# EAGLE board simple-spectro-pro (EAGLE 8.3.0)
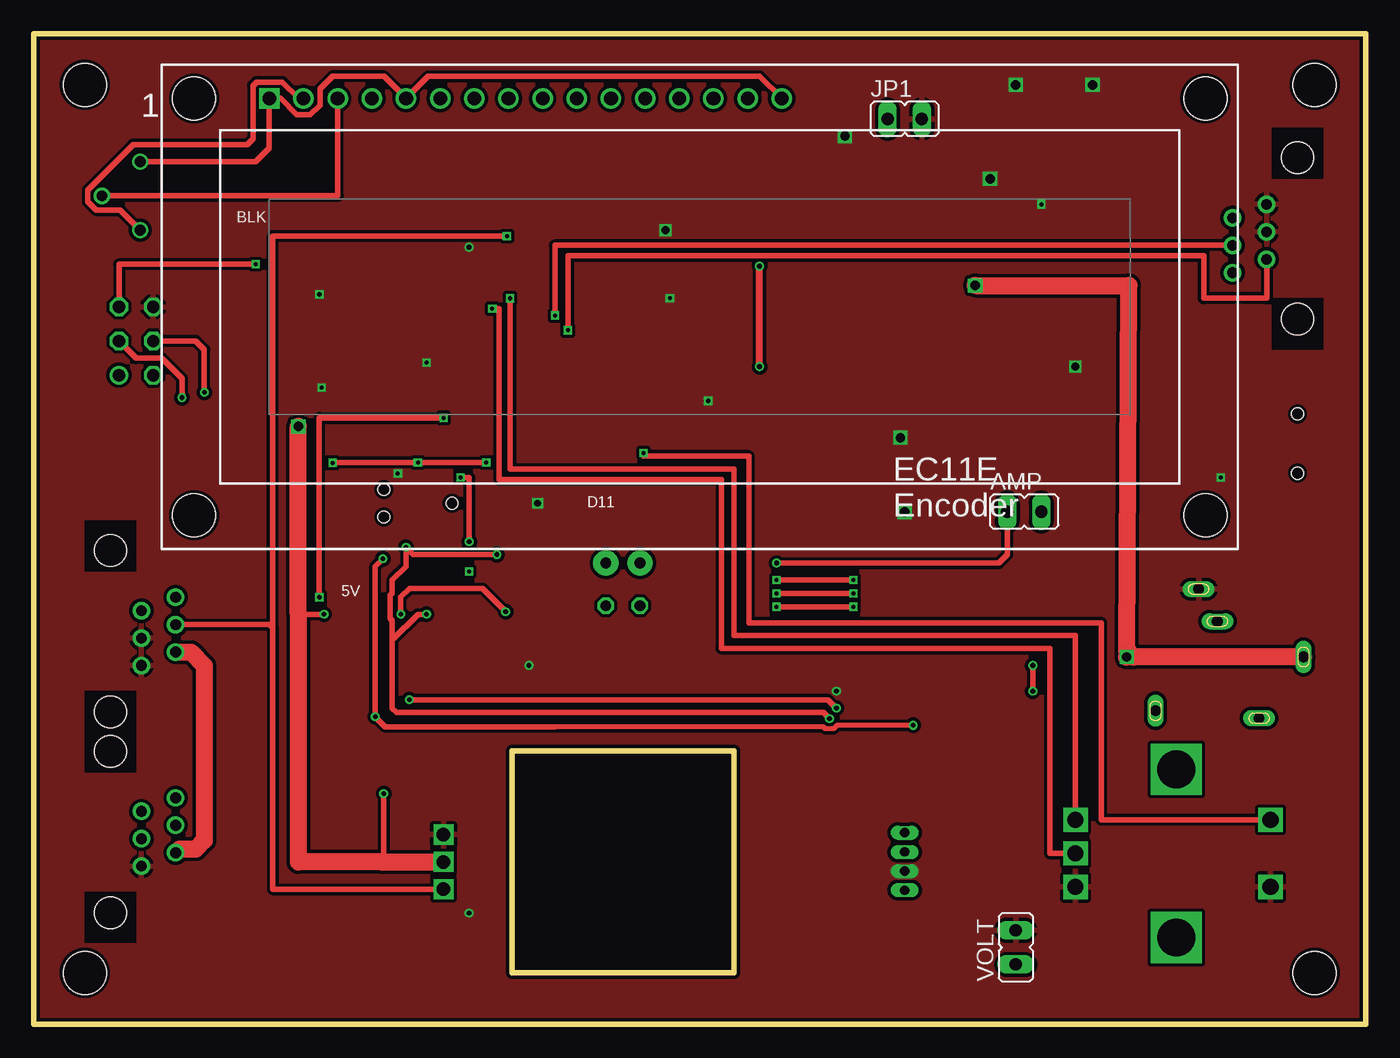
[diagram p0: board, top side]
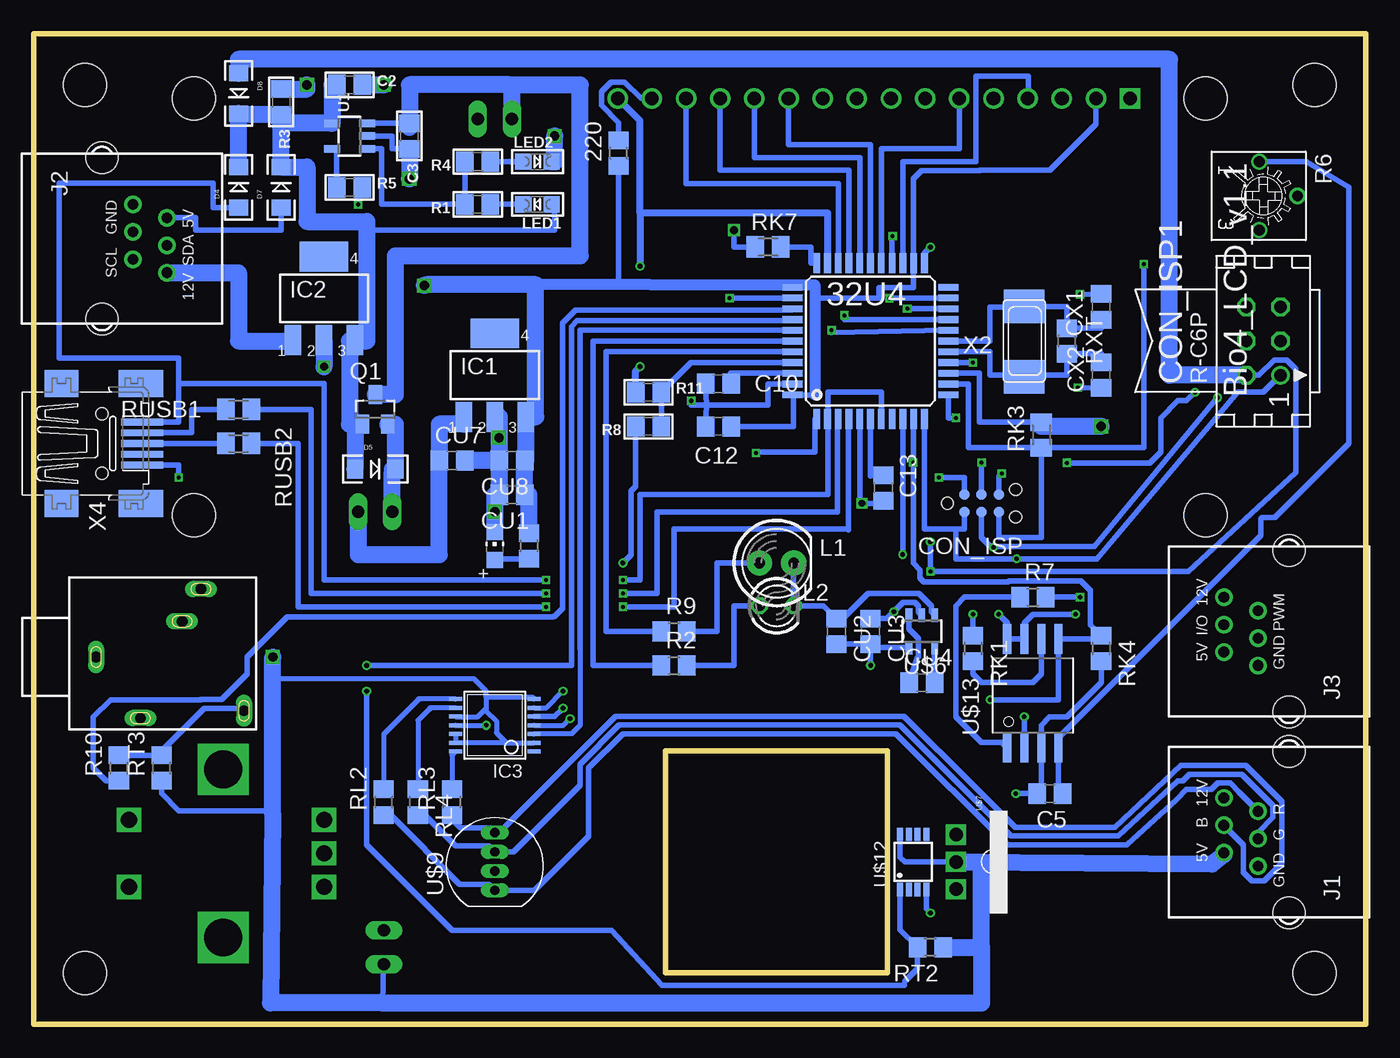
[diagram p1: board, bottom side, seen from below]

Size 99.06 x 73.66 mm. Coordinates in mm from the lower left corner, seen from the top.
Outline: 0,73.66 0,0 99.06,0 99.06,73.66 0,73.66
Outline: 35.56,20.32 52.07,20.32 52.07,3.81 35.56,3.81 35.56,20.32
Copper layers (1*2*15*16): Top 0.035mm / dielectric 0.2mm / layer 2 0.0175mm / dielectric 1.1mm / layer 15 0.0175mm / dielectric 0.2mm / Bottom 0.035mm
Design rules "SeeedStudio_DRU_no_angle_20130527": minimum track width 6mil, minimum drill 12mil, track to track 6mil, track to pad 6mil, pad to pad 6mil, via to via 6mil, smd to smd 0mil, copper to edge 10mil, drill to drill 10mil, minimum pad ring 6mil, minimum via ring 6mil, stop-mask expansion 2mil, vias tented up to drill 25mil, thermal gap 10mil
Net classes: 0 default: width 0.406 mm, clearance 0.25 mm; 1 power: width 0.406 mm, drill 0.305 mm, clearance 0.25 mm; 2 VIN: width 0.406 mm, clearance 0.25 mm; 3 fine: width 0.305 mm, clearance 0.25 mm; 4 aref: width 0.406 mm, clearance 0.25 mm
Holes 3.2 mm at 3.81,69.85 3.81,3.81 95.25,69.85 95.25,3.81

## Footprints (pad centres in the part's own frame; a part is rotated, then mirrored left to right if it is on the bottom)
TQFP44 = smd 1.5 x 0.5: 1 -5.8,4; 2 -5.8,3.2; 3 -5.8,2.4; 4 -5.8,1.6; 5 -5.8,0.8; 6 -5.8,0; 7 -5.8,-0.8; 8 -5.8,-1.6; 9 -5.8,-2.4; 10 -5.8,-3.2; 11 -5.8,-4; 23 5.8,-4; 24 5.8,-3.2; 25 5.8,-2.4; 26 5.8,-1.6; 27 5.8,-0.8; 28 5.8,0; 29 5.8,0.8; 30 5.8,1.6; 31 5.8,2.4; 32 5.8,3.2; 33 5.8,4 | smd 0.5 x 1.5: 12 -4,-5.8; 13 -3.2,-5.8; 14 -2.4,-5.8; 15 -1.6,-5.8; 16 -0.8,-5.8; 17 0,-5.8; 18 0.8,-5.8; 19 1.6,-5.8; 20 2.4,-5.8; 21 3.2,-5.8; 22 4,-5.8; 34 4,5.8; 35 3.2,5.8; 36 2.4,5.8; 37 1.6,5.8; 38 0.8,5.8; 39 0,5.8; 40 -0.8,5.8; 41 -1.6,5.8; 42 -2.4,5.8; 43 -3.2,5.8; 44 -4,5.8
R0805 = smd 1.3 x 1.5: 1 -0.95,0; 2 0.95,0
JP1 = drill 0.914 long: 1 0,-1.27; 2 0,1.27
0805 = smd 1.3 x 1.5: 1 -0.95,0; 2 0.95,0
C0805 = smd 1.3 x 1.5: 1 -0.95,0; 2 0.95,0
TC2030-MCP-NL = smd 0.787 x 0.787: 5V 1.27,0.635; GND 3.81,0.635; MISO 1.27,-0.635; MOSI 2.54,0.635; RESET 3.81,-0.635; SCK 2.54,-0.635 | hole 0.889: 0,0; 5.08,-1.016; 5.08,1.016
TINYISP = drill 0.914 octagon: GND 2.54,1.27; MOSI 0,1.27; RESET 2.54,-1.27; SCK 0,-1.27; VCC -2.54,1.27 | drill 0.914: MISO -2.54,-1.27
LED-1206 = smd 1.2 x 1.4: A -1.5,0; C 1.5,0
SOT223 = smd 1.219 x 2.235: 1 -2.311,-3.099; 2 0,-3.099; 3 2.311,-3.099 | smd 3.6 x 2.2: 4 0,3.099
TSSOP14 = smd 0.305 x 0.991: 1 -1.95,-2.918; 2 -1.3,-2.918; 3 -0.65,-2.918; 4 0,-2.918; 5 0.65,-2.918; 6 1.3,-2.918; 7 1.95,-2.918; 8 1.95,2.918; 9 1.3,2.918; 10 0.65,2.918; 11 0,2.918; 12 -0.65,2.918; 13 -1.3,2.918; 14 -1.95,2.918
RJ12-RIGHTRANGE-RGB = drill 0.8 pad 1.3: +5V -1.54,4.84; +12V 2.54,4.84; B 0.5,4.84; G -0.5,2.3; GND1 -2.54,2.3; R 1.54,2.3 | hole 2.36: -6,0; 6,0
RJ12-RIGHTANGLE-I2C = drill 0.8 pad 1.3: +5V -1.54,4.84; +12V 2.54,4.84; GND1 -2.54,2.3; GND2 -0.5,2.3; SCL 1.54,2.3; SDA 0.5,4.84 | hole 2.36: -6,0; 6,0
RJ12-RIGHTANGLE = drill 0.8 pad 1.3: +5V -1.54,4.84; +12V 2.54,4.84; GND1 -2.54,2.3; GND2 -0.5,2.3; I/O 0.5,4.84; PWM 1.54,2.3 | hole 2.36: -6,0; 6,0
LED5MM = drill 0.813 pad 1.88: A -1.27,0; K 1.27,0
LED3MM = drill 0.813 octagon: A -1.27,0; K 1.27,0
CHIP-LED0805 = smd 1.2 x 1.2: A 0,-1.05; C 0,1.05
CHIPLED_0805 = smd 1.2 x 1.2: A 0,-1.05; C 0,1.05
SOT-23 = smd 1 x 1.4: 1 -0.95,-1.1; 2 0.95,-1.1; 3 0,1.1
TRIMMER_3362P = drill 0.8: 1 -2.54,-0.31; 2 0,2.54; 3 2.54,-0.31
M0805 = smd 1.3 x 1.6: 1 -0.95,0; 2 0.95,0
SOT23-5 = smd 0.55 x 1.2: 1 -0.95,-1.3; 2 0,-1.3; 3 0.95,-1.3; 4 0.95,1.3; 5 -0.95,1.3
EC11E = drill 1.2 square: A -2.5,0; B 0,0; C 2.5,0; D -2.5,14.5; E 2.5,14.5 | drill 2.8 square: P$1 6.25,7.5; P$2 -6.25,7.5
SOT23-5' = smd 0.5 x 1: 1 -0.95,-1.2; 2 0,-1.2; 3 0.95,-1.2; 4 0.95,1.2; 5 -0.95,1.2
TSL237 = drill 1 pad 1.27 square: GND -2.032,-2.54; OUT 2.032,-2.54; VDD 0,-2.54
LED-TRICOLOR-THROUGHHOLE = drill 0.7 long: BLU 2.175,0; GND -0.682,0; GRN 0.746,0; RED -2.111,0
LCD-16X2-4HOLES = drill 1.016 square: 1 -32,15.5 | drill 1.016: 2 -29.46,15.5; 3 -26.92,15.5; 4 -24.38,15.5; 5 -21.84,15.5; 6 -19.3,15.5; 7 -16.76,15.5; 8 -14.22,15.5; 9 -11.68,15.5; 10 -9.14,15.5; 11 -6.6,15.5; 12 -4.06,15.5; 13 -1.52,15.5; 14 1.02,15.5; 15 3.56,15.5; 16 6.1,15.5 | hole 3.2: -37.6,15.5; -37.6,-15.5; 37.6,-15.5; 37.6,15.5
MSOP8 = smd 0.45 x 1: 1 -0.975,-2.05; 2 -0.325,-2.05; 3 0.325,-2.05; 4 0.975,-2.05; 5 0.975,2.05; 6 0.325,2.05; 7 -0.325,2.05; 8 -0.975,2.05
SOIC_8-LEAD = smd 0.61 x 2.21: CE -1.905,-2.934; RST/HOLD -0.635,5.156; SCK 0.635,5.156; SI 1.905,5.156; SO -0.635,-2.934; VDD -1.905,5.156; VSS 1.905,-2.934; WP 0.635,-2.934
NX6035 = smd 2.5 x 3: P$1 2.665,0; P$2 -2.565,0
1503_09 = drill 0.8 pad 1.2 long: 1 0,-2.1; 2 -4.55,-5.4; 3 5.05,-9.9; 4 -4,-13.1; 5 2.65,-8.5
32005-201 = smd 3.1 x 0.5: 1 3,1.6; 2 3,0.8; 3 3,0; 4 3,-0.8; 5 3,-1.6 | smd 2.5 x 2: M1 -3,-4.45; M2 -3,4.45 | smd 3.3 x 2: M3 2.9,4.45; M4 2.9,-4.45 | hole 0.9: 0,2.2; 0,-2.2

## Placement (x,y rotation side)
32U4  32U4  [TQFP44]  36.83,50.8 90 bottom
220  220  [R0805]  55.56,64.77 90 bottom
AMP  BAT  [JP1]  73.66,38.1 270 top
C2  10µF  [0805]  75.56,69.85 0 bottom
C3  10µF  [0805]  71.12,66.04 270 bottom
C5  100n  [C0805]  23.5,17.14 180 bottom
C10  100nF  [C0805]  48.14,47.62 180 bottom
C12  100nF  [C0805]  48.14,44.45 0 bottom
C13  100nF  [C0805]  35.88,39.88 90 bottom
CON_ISP  SPI  [TC2030-MCP-NL]  31.11,38.73 0 bottom
CON_ISP1  SPI  [TINYISP]  7.62,50.8 90 bottom
CU1  100nF  [C0805]  63.5,39.37 180 bottom
CU2  1u  [C0805]  39.37,29.21 270 bottom
CU3  1u  [C0805]  36.83,29.21 270 bottom
CU4  1u  [C0805]  33.02,25.4 0 bottom
CU7  10u  [C0805]  67.94,41.91 0 bottom
CU8  10u  [C0805]  63.5,41.91 180 bottom
CX1  22pF  [C0805]  19.68,53.34 270 bottom
CX2  22pF  [C0805]  19.68,48.26 90 bottom
D4  1N581D1206  [LED-1206]  83.82,62.23 90 bottom
D5  1N581D1206  [LED-1206]  73.66,41.27 0 bottom
D7  1N581D1206  [LED-1206]  80.64,62.23 90 bottom
D8  1N581D1206  [LED-1206]  83.82,69.22 270 bottom
IC1  MCP1703-33  [SOT223]  64.77,48.26 0 bottom
IC2  MCP1703-50  [SOT223]  77.47,53.98 0 bottom
IC3  MCP43X2ST  [TSSOP14]  64.77,22.23 90 bottom
J1  RJ12RIGHTANGLE-RGB  [RJ12-RIGHTRANGE-RGB]  5.71,14.29 90 bottom
J2  RJ12RIGHTANGLE-I2C  [RJ12-RIGHTANGLE-I2C]  93.98,58.42 270 bottom
J3  RJ12RIGHTANGLE  [RJ12-RIGHTANGLE]  5.71,29.21 90 bottom
JP1  BAT  [JP1]  64.77,67.31 270 top
L1  UV  [LED5MM]  43.81,34.29 0 bottom
L2  UV  [LED3MM]  43.81,31.11 0 bottom
LDPW5  RED  [CHIP-LED0805]  64.77,35.56 0 bottom
LED1  RED  [CHIPLED_0805]  61.59,60.96 90 bottom
LED2  GREEN  [CHIPLED_0805]  61.59,64.14 270 bottom
Q1  DMP1045U  [SOT-23]  73.66,45.72 0 bottom
R1  470  [0805]  66.04,60.96 180 bottom
R2  100  [R0805]  51.44,26.67 0 bottom
R3  100k  [0805]  80.64,68.58 270 bottom
R4  470  [0805]  66.04,64.14 180 bottom
R5  10K\  [0805]  75.56,62.23 0 bottom
R6  10k  [TRIMMER_3362P]  7.62,61.59 270 bottom
R7  1k  [R0805]  24.77,31.75 0 bottom
R8  10K\  [0805]  53.34,44.45 180 bottom
R9  100  [R0805]  51.44,29.21 0 bottom
R10  1K  [R0805]  92.71,19.05 90 bottom
R11  10K\  [0805]  53.34,46.99 0 bottom
R13  1k  [R0805]  62.23,35.56 270 bottom
RK1  10k  [R0805]  29.21,27.94 270 bottom
RK3  100k  [M0805]  24.13,43.81 90 bottom
RK4  10k  [R0805]  19.68,27.94 270 bottom
RK7  10k  [M0805]  44.45,57.78 0 bottom
RL2  50  [R0805]  73.03,16.51 90 bottom
RL3  50  [R0805]  67.94,16.51 90 bottom
RL4  50  [R0805]  70.48,16.51 270 bottom
RT2  4.7k  [R0805]  32.38,5.71 180 bottom
RT3  4.7k  [R0805]  89.53,19.05 90 bottom
RUSB1  22  [M0805]  83.82,45.72 180 bottom
RUSB2  22  [M0805]  83.82,43.18 180 bottom
RXT  1M  [R0805]  22.23,50.8 90 bottom
U1  MCP73831T  [SOT23-5]  75.56,66.04 90 bottom
U$1  EC11E  [EC11E]  77.47,12.7 270 top
U$6  TPS6040X  [SOT23-5']  33.02,29.21 180 bottom
U$7  TSL237  [TSL237]  27.94,12.06 270 bottom
U$9  RGB-COMMON-CATHODE  [LED-TRICOLOR-THROUGHHOLE]  64.77,12.06 90 bottom
U$11  LCD-HD447804-HOLES16X2-4-HOLES  [LCD-16X2-4HOLES]  49.53,53.34 0 top
U$12  DS18B20  [MSOP8]  33.66,12.06 0 bottom
U$13  SST26VF064B  [SOIC_8-LEAD]  24.77,23.5 0 bottom
VOLT  [JP1]  73.03,5.71 0 top
X2  8MHz  [NX6035]  25.4,50.8 270 bottom
X3  1503_09  [1503_09]  96.52,27.3 90 bottom
X4  MINI-USB  [32005-201]  93.98,43.18 0 bottom

## Library data of the parts
32U4 LDPW5 = adafruit
220 C5 C10 C12 C13 CU1-CU4 CU7 CU8 CX1 CX2 R2 R7 R9 R10 RK1 RK4 RL2-RL4 RXT = rcl
AMP JP1 VOLT = jumper
C2 C3 LED1 LED2 R1 R3-R5 R8 R11 U1 = microbuilder
CON_ISP D4 D5 D7 D8 J1-J3 U$1 U$6 U$7 U$9 U$12 X2 = lpatiny
CON_ISP1 = lpatiny; OC_FARNELL: unknown; OC_NEWARK: unknown
IC1 IC2 = linear
IC3 = microchip-mcp43x2
L1 = SparkFun
L2 = led
Q1 R6 = dp_devices
R13 RK3 RK7 RT2 RT3 RUSB1 RUSB2 = resistor
U$11 = HD44780LCD
U$13 = BertaLib
X3 = con-lumberg; OC_FARNELL: 1243244; OC_NEWARK: unknown
X4 = con-cypressindustries; OC_FARNELL: unknown; OC_NEWARK: unknown

## Nets
A0: 32U4.36 R10.1
A1 [fine]: 32U4.37 RT2.2 U$12.1
A2: 32U4.38 IC3.3
A3: 32U4.39 R2.1
A4: 32U4.40 R9.1
A5: 32U4.41 R8.1 R11.2
A6: 32U4.25 U$11.4
AREF: 32U4.42 C10.1
BLUE: IC3.14 RL3.2
D5*: 32U4.31 U$11.14
D6*: 32U4.27 U$11.6
D7*: 32U4.1 U$1.D
D8*: 32U4.28 U$11.11
D9*: 32U4.29 U$11.12
D10*: 32U4.30 U$11.13
D11*: 32U4.12 R7.2
D12*: 32U4.26 J3.I/O U$7.OUT
D13*: 32U4.32 C5.1 R6.1 R11.1 U$11.1 U$11.5 U$11.16 U$13.VSS
EXT-B: J1.B RL3.1 U$9.BLU
EXT-G: J1.G RL4.2 U$9.GRN
EXT-R: J1.R RL2.1 U$9.RED
GND [power]: 32U4.5 32U4.15 32U4.23 32U4.35 32U4.43 C2.2 C3.2 C10.2 C12.1 C13.1 CON_ISP1.GND CON_ISP.GND CU1.2 CU2.2 CU3.2 CU7.2 CU8.2 CX1.1 CX2.1 IC1.2 IC2.2 IC3.6 J1.GND1 J2.GND1 J2.GND2 J3.GND1 J3.GND2 JP1.2 LDPW5.C LED2.C R3.1 R5.2 RK7.1 U1.2 U$1.C U$1.E U$6.4 U$7.GND U$9.GND U$12.4 VOLT.2 X3.3 X4.5
GREEN: IC3.9 RL4.1
HWB: 32U4.33 RK7.2
I2C+5V: D7.A J2.+5V
I2C+12V [power]: IC2.1 J2.+12V
ISP+5V: CON_ISP1.VCC CON_ISP.5V D8.A
MEM_SEL: R7.1 U$13.CE
MISO: 32U4.11 CON_ISP1.MISO CON_ISP.MISO IC3.11 U$13.SO
MOSI: 32U4.10 CON_ISP1.MOSI CON_ISP.MOSI IC3.5 RK4.1 U$13.SI
N$1: 32U4.6 C13.2
N$2: R6.2 U$11.3
N$3: L1.A R9.2
N$4: LED1.C R1.1
N$5: R1.2 R4.2 U1.1
N$6: R5.1 U1.5
N$7: LED2.A R4.1
N$8: L2.A R2.2
N$9 [power]: R10.2 RT3.2 X3.4
N$11: 220.2 U$11.15
N$12: LDPW5.A R13.2
N$15: C2.1 D4.C D5.A D7.C D8.C IC2.3 LED1.A Q1.1 R3.2 U1.4
N$17 [power]: AMP.1 D5.C Q1.2 R8.2
N$18: IC3.1
N$19: CU4.2 U$6.5
N$20: CU4.1 U$6.3
N$23: RK1.2 U$13.SCK
N$42: 32U4.17 CX1.2 RXT.2 X2.P$2
RED: IC3.8 RL2.2
RESET: 32U4.13 CON_ISP1.RESET CON_ISP.RESET RK3.1
RX: 32U4.20 U$1.B
RXLED: 32U4.8
SCK: 32U4.9 CON_ISP1.SCK CON_ISP.SCK IC3.4 RK1.1
SCL: 32U4.18 J2.SCL
SDA: 32U4.19 J2.SDA
TX: 32U4.21 U$1.A
TXLED: 32U4.22
USB_N: 32U4.3 RUSB1.1
USB_P: 32U4.4 RUSB2.1
USBC_N: RUSB1.2 X4.2
USBC_P: RUSB2.2 X4.3
V- [power]: CU2.1 L1.K L2.K U$6.1
VBAT1: C3.1 JP1.1 Q1.3 U1.3
VCC: 32U4.14 32U4.24 32U4.34 32U4.44 220.1 C5.2 C12.2 CU1.1 CU3.1 CU8.1 IC1.3 IC3.2 IC3.7 IC3.10 IC3.12 IC3.13 J1.+5V J3.+5V R6.3 R13.1 RK3.2 RK4.2 RT2.1 RT3.1 U$6.2 U$7.VDD U$11.2 U$12.8 U$13.RST/HOLD U$13.VDD U$13.WP VOLT.1 X3.1
VDD [power]: AMP.2 CU7.1 IC1.1
VUSB: 32U4.2 32U4.7 D4.A X4.1
XTAL1: 32U4.16 CX2.2 RXT.1 X2.P$1

## Tracks (layer width: path | path; a pad name or v marks a point on that pad's centre or on a via)
A0
  Bottom 0.406: R10.1 93.67,18.1 94.61,19.05 94.61,22.86 93.34,24.13 86.65,24.13 86.63,24.15 85.07,24.15 83.19,26.04 83.19,27.3 80.21,30.28 60.45,30.28 60.41,30.32 60.33,30.32 59.73,30.91 59.73,52.14 58.77,53.1 42.73,53.1 32U4.36
A1  (via drill 0.35)
  Top 0.406: v74.3,26.67 v74.3,24.77
  Bottom 0.305: 33.36,5.74 RT2.2 | 34.31,2.88 34.29,3.17
  Bottom 0.406: 32U4.37 42.73,52.3 58.65,52.3 59.08,51.87 59.08,27.67 59.05,27.65 59.05,26.67 v74.3,26.67 | v74.3,24.77 74.3,13.34 67.94,6.99 56.11,6.99 52.32,2.88 34.31,2.88 | U$12.1 34.63,7.01 33.36,5.74 33.36,4.11 34.29,3.17
A2
  Bottom 0.356: 58.42,27.94 58.42,22.23 59.05,21.59 61.84,21.59 IC3.3
  Bottom 0.406: 32U4.38 58.42,51.6 58.42,27.94
A3
  Bottom 0.406: 32U4.39 57.48,50.8 57.48,26.67 R2.1
A4
  Bottom 0.406: 42.63,50.04 32U4.40 56.52,50 56.52,29.21 R9.1
A5
  Bottom 0.406: 42.63,49.21 32U4.41 50.18,49.2 R11.2 R8.1
A6
  Bottom 0.406: U$11.4 25.08,68.84 25.08,70.48 29,70.48 29,64.14 34.43,64.14 32U4.25
AREF
  Bottom 0.406: 32U4.42 47.25,48.4 C10.1
BLUE
  Bottom 0.356: IC3.14 67.94,20.02 RL3.2
  Bottom 0.406: RL3.2 67.94,17.48
D5*
  Bottom 0.406: 39.24,56.6 32U4.31 39.23,62.5 50.55,62.5 U$11.14
D6*
  Bottom 0.406: 32U4.27 36.03,65.09 30.23,65.09 U$11.6
D7*  (via drill 0.3)
  Top 0.406: U$1.D 79.38,15.2 79.38,29.84 53.17,29.84 53.17,42.24 45.34,42.24 v45.34,42.48
  Bottom 0.406: 32U4.1 40.96,45 40.96,42.55 45.34,42.55 v45.34,42.48 | 91.97,14.93 U$1.D
D8*
  Bottom 0.406: 32U4.28 36.83,65.41 42.93,65.41 U$11.11
D9*
  Bottom 0.406: 32U4.29 37.63,64.45 45.47,64.45 U$11.12
D10*
  Bottom 0.406: 32U4.30 38.43,63.5 48.01,63.5 U$11.13
D11*  (via drill 0.3)
  Top 0.406: v21.25,31.75 21.25,45.09 v30.48,45.09
  Bottom 0.406: v30.48,45.09 31.03,45.09 32U4.12 | v21.25,31.75 R7.2
D12*  (via drill 0.3)
  Top 0.406: v35.19,58.61 17.78,58.61 17.78,29.5 | 17.78,29.5 17.78,10.03 U$7.OUT | J3.I/O 17.57,29.71 17.78,29.5
  Bottom 0.406: 32U4.26 35.24,58.51 35.19,58.51 v35.19,58.61
D13*  (via drill 0.35)
  Top 0.406: R6.1 16.51,64.14 17.53,65.16 U$11.1 18.35,68.84 19.57,67.62 20.57,67.62 21.29,68.34 21.29,69.55 22.23,70.48 26.05,70.48 U$11.5 29.34,70.48 53.98,70.48 U$11.16
  Top 0.508: v53.98,48.9 v53.98,56.37
  Bottom 0.406: 32U4.32 40.01,56.6 | 53.95,60.33 53.98,60.35 | C5.1 22.86,17.46 U$13.VSS 22.86,21.3 7.82,36.33 7.82,37.55 7.7,37.67 6.78,37.67 1.27,43.18 1.27,62.23 4.45,64.14 R6.1
  Bottom 0.508: 40.01,56.6 40.01,60.33 53.95,60.33 | R11.1 54.29,48.58 v53.98,48.9 | v53.98,56.37 53.98,60.35 53.98,67.19 U$11.16
EXT-B
  Bottom 0.406: RL3.1 67.94,15.24 67.31,14.61 65.14,14.61 U$9.BLU 64.45,14.24 55.79,22.9 34.65,22.9 | 34.65,22.9 34.38,22.9 | J1.B 9.12,13.35 9.12,11.29 8.47,10.64 7.56,10.64 6.25,11.95 6.25,16.56 8.94,19.24 13.75,19.24 18.66,14.65 26.08,14.65 29.21,17.78 | 29.38,17.95 29.21,17.78 | 29.21,17.78 34.33,22.9 34.65,22.9
EXT-G
  Bottom 0.406: RL4.2 69.99,15.56 67.69,13.26 65.22,13.26 U$9.GRN 63.39,12.81 58.44,17.76 58.44,19.32 55.52,22.25 34.65,22.25 26.4,13.99 18.39,13.99 13.97,18.1 13.63,18.1 13.14,18.59 9.21,18.59 6.91,16.28 6.91,15.37 8.02,14.27 J1.G
EXT-R
  Bottom 0.406: RL2.1 72.53,15.56 67.37,10.4 65.22,10.4 U$9.RED 61.8,9.95 57.78,13.97 57.78,19.05 55.24,21.59 34.97,21.59 | 34.97,21.59 34.92,21.59 | 14.07,16.73 14.61,16.19 | 14.07,16.73 13.34,17.46 11.48,17.46 11.01,17.93 10.1,17.93 9.45,17.28 9.45,17.26 J1.R | 14.07,16.73 17.78,13.34 26.67,13.34 34.92,21.59 | 34.92,21.59 34.97,21.59
GND  (via drill 0.3, 0.35, 0.5 pad 0.61, 0.6, 0.7)
  Bottom 0.356: IC3.6 60.93,23.52 v59.69,24.77
  Bottom 0.406: 49.02,47.6 C10.2 49.02,46.04 | 49.02,46.04 C12.1 | 32U4.43 44.45,47.6 44.45,46.04 49.02,46.04 | v50.16,46.35 50.16,46.04 49.02,46.04 | 32U4.5 37.63,38.73 v37.47,38.73 35.88,38.73 C13.1 | C3.2 72.39,65.09 72.39,66.04 U1.2 | 64.77,41.91 CU8.2 | CU1.2 64.77,39.37 | X4.5 88.27,41.58 v88.27,40.64 | 32U4.35 v47.3,54 | CX1.1 v21.25,54.27 | 32U4.15 v29.22,49.2 | v29.22,49.2 | 32.85,56.6 32U4.23 32.83,57.34 v32.38,57.78 | CON_ISP.GND 27.3,40.72 v27.08,40.95 | RK7.1 46.99,57.78 v46.99,59.05 | CX2.1 v21.42,47.33 | R5.2 74.93,62.23 v74.93,60.96 | U$6.4 36.58,28.01 CU3.2 | CU2.2 CU3.2 | U$12.4 32.68,8.6 v32.38,8.26 | CU3.2 v36.83,26.67
  Bottom 1.27: IC2.2 v77.47,48.9 | LED2.C 60.33,64.14 v60.33,66.04 | C3.2 v71.12,62.87 | C2.2 v73.03,69.85 | R3.1 78.74,69.53 v78.74,69.85 | IC1.2 64.45,45.16 v64.45,43.62 CU8.2 | CU8.2 CU7.2 | CU8.2 CU1.2 | LDPW5.C v64.77,38.1 64.77,39.37
  pour Top: 0,73.66 0,0 99.06,0 99.06,73.66
GREEN
  Bottom 0.356: 69.63,23.45 70.48,22.6 RL4.1 | IC3.9 69.56,23.52
  Bottom 0.406: 69.56,23.52 69.63,23.45
HWB
  Bottom 0.406: 32U4.33 41.27,56.6 41.27,57.78 RK7.2
I2C+5V
  Bottom 0.406: D7.A 80.64,59.05 87,59.05 87,59.96 J2.+5V
I2C+12V
  Bottom 1.27: J2.+12V 83.82,55.88 83.82,50.8 79.78,50.8 IC2.1
ISP+5V  (via drill 0.3, 0.35)
  Top 0.406: v31.75,40.64 32.38,40.64 v32.38,35.88
  Bottom 0.406: CON_ISP.5V 29.84,40.64 v31.75,40.64 | CON_ISP1.VCC 7.96,48.26 6.82,49.4 5.88,49.4 5.21,48.73 5.21,41.02 13.21,33.66 v32.38,33.66 v32.38,35.88
  Bottom 1.27: CON_ISP1.VCC 14.61,48.26 14.61,71.75 83.82,71.75 D8.A
MEM_SEL
  Bottom 0.406: R7.1 29.84,31.75 30.48,31.11 30.48,22.86 28.57,20.95 27.06,20.95 U$13.CE
MISO  (via drill 0.35)
  Top 0.356: v65.41,22.23 59.75,22.23 59.49,21.96 58.86,21.96 58.71,22.11 38.73,22.11
  Top 0.406: 38.73,22.11 26.14,22.11 v25.4,22.86 25.4,34.04 v25.97,34.61
  Bottom 0.356: IC3.11 v65.41,22.23
  Bottom 0.406: CON_ISP.MISO 29.84,36.83 30.48,36.83 | 30.48,36.83 32.83,36.83 32U4.11 | 30.48,36.83 30.48,34.61 v25.97,34.61 20,34.61 9.53,46.99 7.62,46.99 CON_ISP1.MISO | v25.4,22.86 U$13.SO
MOSI  (via drill 0.3, 0.35)
  Top 0.406: v33.66,41.77 v28.57,41.77 22.23,41.77 v22.23,41.74 | v12.7,46.99 12.7,50.16 12.06,50.8 CON_ISP1.MOSI | v59.69,23.5 59.05,24.13 v27.94,24.13
  Bottom 0.406: CON_ISP.MOSI v28.57,41.77 | 32U4.10 33.63,41.8 v33.66,41.77 33.66,34.29 33.14,33.78 33.14,33.16 32.88,32.9 26.61,32.9 26.55,32.95 21.2,32.95 20.49,32.24 20.49,29.69 RK4.1 19.92,28.65 U$13.SI 22.86,24.13 v27.94,24.13 | v22.23,41.74 16.05,41.74 15.24,42.55 15.24,45.09 13.97,46.35 13.34,46.35 v12.7,46.99 | IC3.5 60.31,22.88 v59.69,23.5
N$1
  Bottom 0.406: C13.2 36.83,40.77 32U4.6
N$2
  Top 0.406: U$11.3 22.61,61.59 R6.2
  Bottom 0.406: U$11.3
N$3
  Bottom 0.406: R9.2 48.26,29.21 48.26,34.29 L1.A
N$4
  Bottom 0.406: LED1.C R1.1
N$5
  Bottom 0.406: R4.2 R1.2 73.19,60.96 73.19,65.09 U1.1
N$6
  Bottom 0.406: U1.5 76.52,65.09 R5.1
N$7
  Bottom 0.406: R4.1 LED2.A
N$8
  Bottom 0.406: R2.2 46.99,26.67 46.99,31.11 L2.A
N$9
  Bottom 0.406: R10.2 RT3.2 89.53,20.32 86.36,23.5 83.61,23.5 X3.4
N$11
  Bottom 0.406: U$11.15 53.91,68.84 55.13,70.06 56.13,70.06 56.84,69.34 56.84,68.34 55.56,67.05 220.2
N$12
  Bottom 0.406: R13.2 64.77,34.61 LDPW5.A
N$15
  Bottom 0.406: C2.1 76.86,69.85 | 75.16,44.62 Q1.1 | LED1.A 60.33,60.96 60.33,59.05 74.3,59.05 | 75.16,50.8 IC2.3 75.49,50.88 75.56,50.8
  Bottom 1.27: D4.C D8.C 83.82,67.63 R3.2 | 75.16,44.62 D5.A | 75.16,44.62 75.56,44.62 75.56,50.8 | R3.2 D7.C 78.74,63.73 78.74,59.69 74.3,59.69 74.3,59.05 74.3,50.8 75.16,50.8 | 76.86,69.85 U1.4 80.64,66.99 R3.2
N$17  (via drill 0.35)
  Top 0.406: v55.24,34.29 71.75,34.29 72.39,34.92 AMP.1
  Bottom 0.406: R8.2 54.29,39.98 54.63,39.64 54.63,34.9 v55.24,34.29
  Bottom 1.27: Q1.2 72.16,44.62 D5.C | D5.C 72.39,41.27 | AMP.1 72.39,41.05 D5.C
N$19
  Bottom 0.406: U$6.5 CU4.2
N$20
  Bottom 0.406: U$6.3 33.97,29.4 33.27,28.7 33.27,27.32 33.34,27.25 CU4.1
N$23
  Bottom 0.406: RK1.2 29.21,26.04 28.57,25.4 24.77,25.4 24.13,26.04 U$13.SCK
N$42
  Bottom 0.406: 32U4.17 27.94,50.8 27.94,53.34 25.4,53.34 X2.P$2 22.23,53.37 RXT.2 19.68,51.75 CX1.2
RED
  Bottom 0.356: RL2.2 73.03,21.55 70.45,24.13 | IC3.8 70.4,24.18
  Bottom 0.406: 70.4,24.18 70.45,24.13
RESET  (via drill 0.3)
  Top 0.406: v16.51,56.52 6.35,56.52 CON_ISP1.RESET
  Bottom 0.406: 32U4.13 29.54,47.6 29.54,42.87 RK3.1 | CON_ISP.RESET 27.3,36.2 24.13,36.2 RK3.1 | RK3.1 16.51,42.87 v16.51,56.52
RX  (via drill 0.3)
  Top 0.406: v34.1,53.21 34.62,53.21 34.62,40.5 51.13,40.5 51.13,27.94 75.56,27.94 75.56,12.7 U$1.B
  Bottom 0.406: 32U4.20 v34.1,53.2 v34.1,53.21
SCK  (via drill 0.35)
  Top 0.406: v59.17,22.72 59.17,22.74 58.74,23.18 26.99,23.18 26.67,23.5 26.67,28.57 | 26.67,28.57 28.57,30.48 v29.21,30.48 | v11.03,46.59 11.03,48.03 9.53,49.53 7.62,49.53 CON_ISP1.SCK | 26.67,28.57 26.67,30.01 26.52,30.16 26.52,31.9 26.67,32.04 26.67,33.02 27.69,34.04 v27.69,35.47 28.23,34.92 v34.44,34.92
  Bottom 0.356: IC3.4 59.67,22.23 v59.17,22.72
  Bottom 0.406: v29.21,30.48 RK1.1 | CON_ISP.SCK 28.57,36.2 27.94,35.56 27.77,35.56 | 27.77,35.56 27.6,35.56 27.58,35.54 20.18,35.54 v11.03,46.59 | 27.77,35.56 v27.69,35.47 | 32U4.9 v34.43,34.93 v34.44,34.92
SCL  (via drill 0.3)
  Top 0.406: v39.73,51.6 39.73,57.15 87,57.15 87,53.98 91.68,53.98 J2.SCL
  Bottom 0.406: v39.73,51.6 39.73,51.44 32U4.18
SDA  (via drill 0.3)
  Top 0.406: J2.SDA 38.76,57.92 v38.76,52.7
  Bottom 0.406: v38.76,52.7 38.79,52.4 32U4.19
TX  (via drill 0.3)
  Top 0.406: v35.42,53.98 35.42,41.27 52.07,41.27 52.07,28.91 77.47,28.91 U$1.A
  Bottom 0.406: 32U4.21 v35.42,53.98
USB_N  (via drill 0.3)
  Top 0.406: v55.24,32.03 v60.95,32.03
  Bottom 0.406: 32U4.3 39.29,45 39.29,38.1 52.7,38.1 52.7,32.03 v55.24,32.03 | v60.95,32.03 78.42,32.03 78.42,45.72 RUSB1.1
USB_P  (via drill 0.3)
  Top 0.406: v55.24,31.04 v60.95,31.04
  Bottom 0.406: 32U4.4 38.47,45 38.47,36.83 | v60.95,31.04 79.38,31.04 79.38,43.18 RUSB2.1 | v55.24,31.04 51.44,31.04 51.44,36.83 38.47,36.83 | 38.47,36.83 38.47,36.75
USBC_N
  Bottom 0.406: X4.2 87.3,43.98 87.3,45.72 RUSB1.2
USBC_P
  Bottom 0.406: X4.3 RUSB2.2
V-
  Bottom 0.406: U$6.1 32.32,30.66 32.32,31.1 33.24,32.02 37.01,32.02 38.87,30.16 CU2.1 40.33,31.11 L2.K L1.K
VBAT1
  Bottom 0.406: C3.1 U1.3
  Bottom 1.27: 71.12,66.67 C3.1 71.12,69.85 63.68,69.85 | Q1.3 73.66,46.81 72.18,46.81 72.18,57.15 58.42,57.15 58.42,69.85 63.68,69.85 | JP1.1 63.5,69.67 63.68,69.85
VCC  (via drill 0.35, 0.7)
  Top 0.406: U$11.2 19.7,68.84 18.48,70.06 16.58,70.06 16.32,69.79 16.32,65.84 15.88,65.41 7.4,65.41 4.03,62.03 4.03,61.16 4.64,60.54 6.44,60.54 R6.3 | v26.04,17.14 26.04,12.21 25.89,12.06 | v21.59,30.48 19.72,30.48 19.68,30.52 | v27.3,30.48 27.3,31.75 27.94,32.38 33.39,32.38 v35.09,30.68
  Top 1.27: v70.01,54.93 81.44,54.93 81.28,27.81 | 81.28,27.81 v81.28,27.3 | v19.68,44.45 19.68,30.52 19.68,12.06 25.89,12.06 U$7.VDD | J3.+5V 11.7,27.67 12.7,26.67 12.7,13.65 12.06,13.02 10.82,13.02 J1.+5V | X3.1 81.79,27.3 81.28,27.81
  Bottom 0.254: IC3.10 67.67,22.86
  Bottom 0.356: 63.91,20.93 IC3.2 | 63.91,20.93 IC3.13 IC3.12 | 67.67,22.86 66.04,22.86 65.41,23.5 | 65.41,24.29 65.41,23.5 | 65.41,24.29 65.41,24.77 66.32,25.68 81.28,25.68 | IC3.7 61.9,24.29 65.41,24.29 | 65.41,23.5 65.41,23.29 64.65,22.54 64.65,21.67 63.91,20.93
  Bottom 0.406: C12.2 42.55,44.45 42.55,46.8 32U4.44 40.98,46.8 40.8,53.98 | 32U4.14 28.74,48.4 28.74,44.77 RK3.2 | 40.8,53.98 40.8,54.8 32U4.34 | 33.66,56.6 32U4.24 | 33.66,56.6 33.66,54.77 36.22,54.77 36.22,53.98 40.8,53.98 | 220.1 55.56,54.98 53.18,54.98 | U$11.2 20.07,66.92 23.5,63.5 28.71,63.5 28.73,63.48 33.04,63.48 33.66,62.87 33.66,56.6 | CU3.1 35.61,30.16 v35.09,30.68 34.41,31.36 33.53,31.36 33.27,31.1 33.27,30.66 U$6.2 | v26.04,17.14 C5.2 24.13,17.46 U$13.WP 24.13,22.23 23.52,22.84 23.22,22.84 23.2,22.86 22.23,22.86 19.68,25.4 RK4.2 | RT3.1 89.53,17.14 88.27,15.88 81.59,15.88 81.28,15.56 | v21.59,30.48 24.77,30.48 25.4,29.84 U$13.RST/HOLD U$13.VDD 26.67,29.84 v27.3,30.48 | 59.69,1.99 50.08,1.59 | VOLT.1 73.12,1.59 | U$12.8 34.63,12.4 34.29,12.06 U$7.VDD
  Bottom 0.813: IC1.3 62.23,45.16 | 61.72,54.98 53.18,54.98 40.98,54.98 40.98,46.8
  Bottom 1.27: R13.1 62.23,39.37 CU1.1 CU8.1 62.46,41.91 IC1.3 61.72,45.16 61.72,54.98 69.85,54.98 v70.01,54.93 | v81.28,27.3 81.28,25.68 81.28,15.56 81.44,1.59 73.12,1.59 50.08,1.59 28.57,1.59 28.57,5.72 | 28.57,5.72 28.57,12.06 U$7.VDD 11.43,11.91 10.55,12.62 J1.+5V | v19.68,44.45 24.13,44.45 RK3.2 | RT2.1 28.58,5.71 28.57,5.72
VDD
  Bottom 0.406: 67.08,44.62 IC1.1 67.31,45.16 | CU7.1 69.22,41.91
  Bottom 1.27: 67.08,44.62 68.89,44.62 CU7.1 68.89,34.92 74.93,34.92 AMP.2
VUSB  (via drill 0.3)
  Top 0.406: v55.24,33.02 v60.95,33.02
  Bottom 0.406: 40.01,45 40.01,46.99 36.03,46.99 32U4.7 | 32U4.2 40.01,45 | 40.01,45 40.01,39.37 53.98,39.37 53.98,33.02 v55.24,33.02 | v60.95,33.02 77.47,33.02 77.47,47.62 88.27,47.62 | 88.27,47.62 88.27,44.78 X4.1 | 88.27,47.62 88.27,49.53 97.16,49.53 97.16,62.53 85.72,62.53 85.72,60.73 D4.A
XTAL1
  Bottom 0.406: RXT.1 22.23,48.26 25.4,48.26 | 25.4,48.26 X2.P$1 | 25.4,48.26 27.94,48.26 27.94,50 32U4.16 | 21.59,49.66 RXT.1 | CX2.2 19.68,49.85 RXT.1

## Text on the board
tNames: 1 | BLK | D11 | EC11E / Encoder | 5V
bNames: Bio4_LCD_v1.1
tValues: Simple spectrophotometer PRO v.1.0.0
bValues: Simple spectrophotometer PRO v1.0.0